# EAGLE board atmega328_dip (EAGLE 5.11)
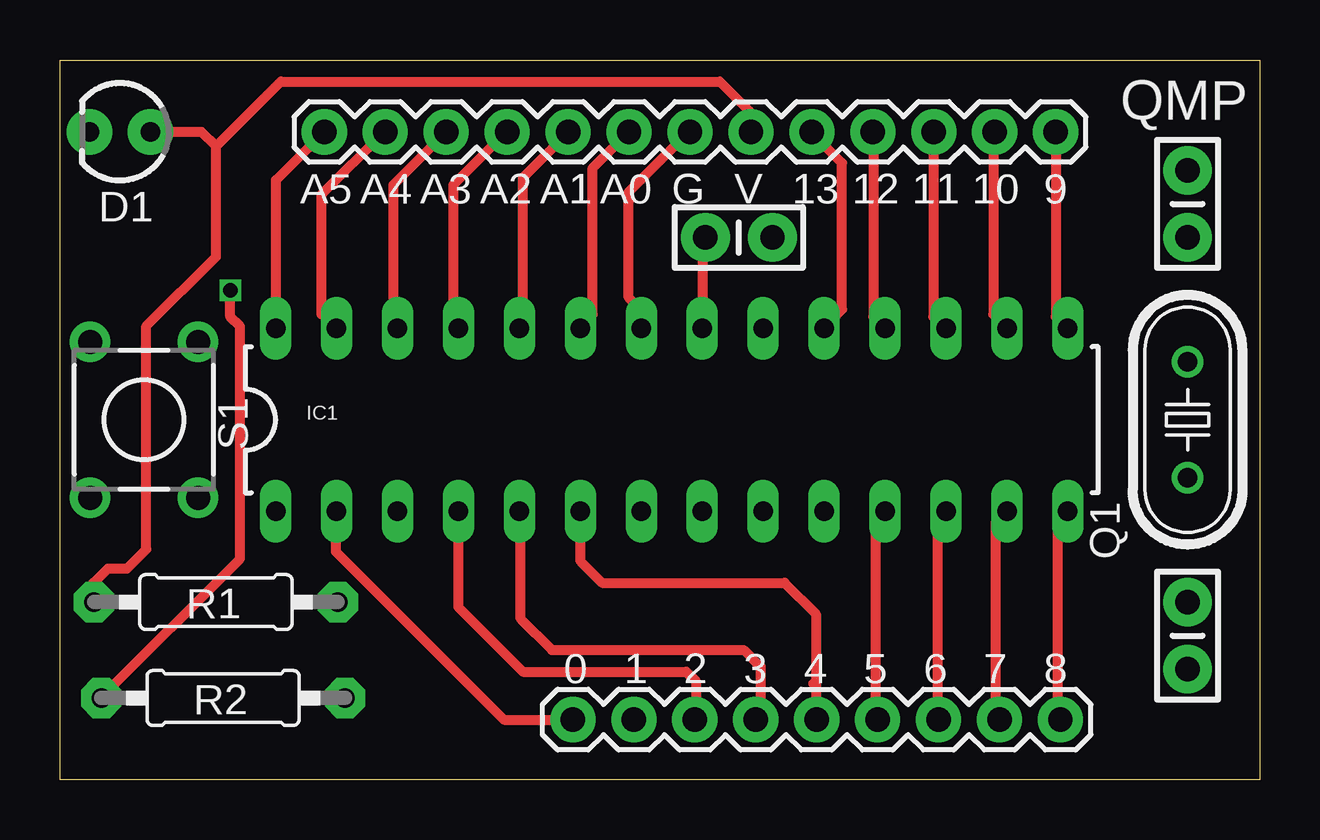
[diagram p0: board, top side]
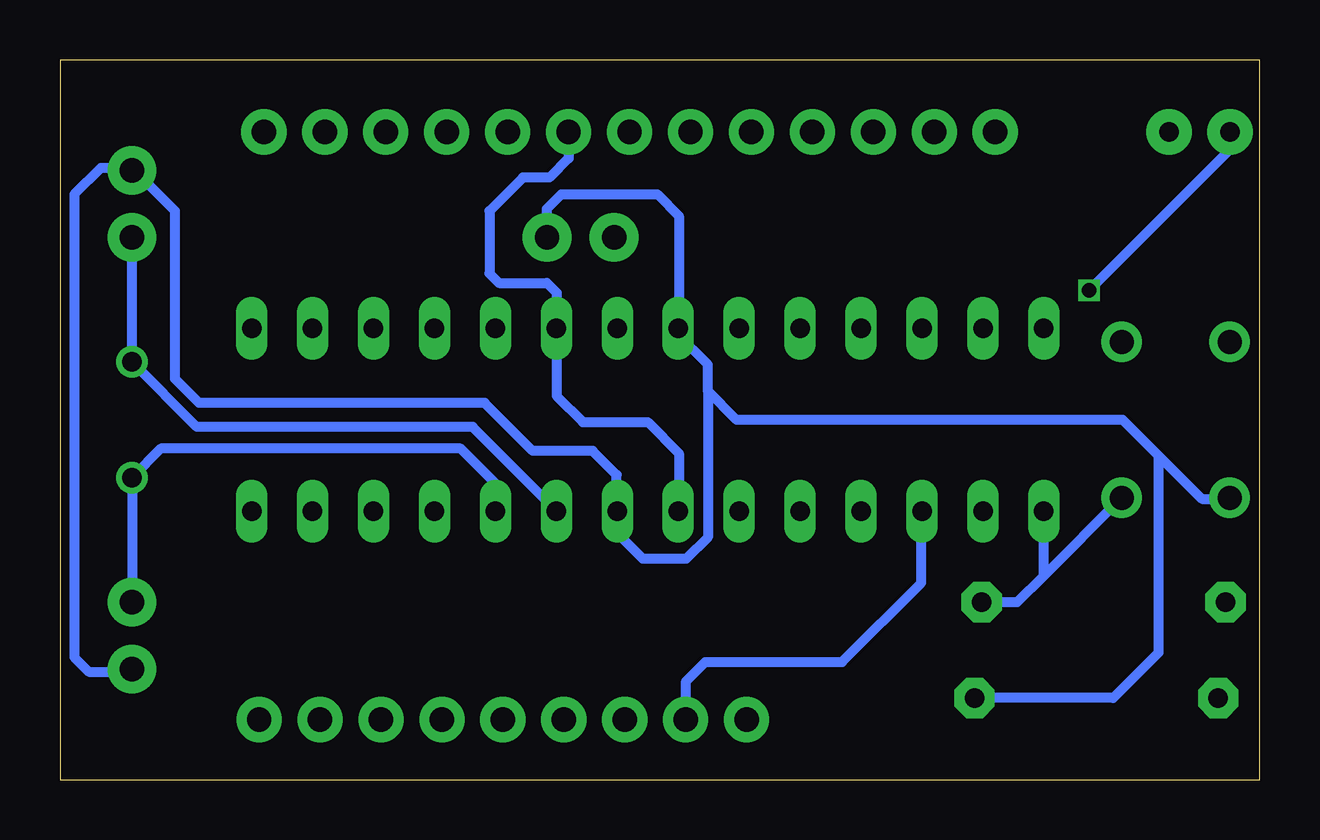
[diagram p1: board, bottom side, seen from below]

Size 50 x 30 mm. Coordinates in mm from the lower left corner, seen from the top.
Outline: 0,0 0,30 50,30 50,0 0,0
Copper layers (1*16): Top 0.035mm / dielectric 1.5mm / Bottom 0.035mm
Design rules "Fusion_eagle_rule_v1.1": minimum track width 6mil, minimum drill 12mil, track to track 6mil, track to pad 6mil, pad to pad 6mil, via to via 6mil, smd to smd 0mil, copper to edge 10mil, drill to drill 10mil, minimum pad ring 10mil, minimum via ring 6mil, stop-mask expansion 2mil, vias tented up to drill 100mil, thermal gap 10mil

## Footprints (pad centres in the part's own frame; a part is rotated, then mirrored left to right if it is on the bottom)
CAP-PTH-SMALL-KIT = drill 1.016 pad 2.032 round: 1 -1.397,0; 2 1.397,0
LED3MM = drill 0.813 pad 1.88 round: A -1.27,0; K 1.27,0
1X13 = drill 1.016 pad 1.88 round: 1 0,0; 2 2.54,0; 3 5.08,0; 4 7.62,0; 5 10.16,0; 6 12.7,0; 7 15.24,0; 8 17.78,0; 9 20.32,0; 10 22.86,0; 11 25.4,0; 12 27.94,0; 13 30.48,0
1X09 = drill 1.016 pad 1.88 round: 1 0,0; 2 2.54,0; 3 5.08,0; 4 7.62,0; 5 10.16,0; 6 12.7,0; 7 15.24,0; 8 17.78,0; 9 20.32,0
DIL28-3 = drill 0.813 long: 1 -16.51,-3.81; 2 -13.97,-3.81; 3 -11.43,-3.81; 4 -8.89,-3.81; 5 -6.35,-3.81; 6 -3.81,-3.81; 7 -1.27,-3.81; 8 1.27,-3.81; 9 3.81,-3.81; 10 6.35,-3.81; 11 8.89,-3.81; 12 11.43,-3.81; 13 13.97,-3.81; 14 16.51,-3.81; 15 16.51,3.81; 16 13.97,3.81; 17 11.43,3.81; 18 8.89,3.81; 19 6.35,3.81; 20 3.81,3.81; 21 1.27,3.81; 22 -1.27,3.81; 23 -3.81,3.81; 24 -6.35,3.81; 25 -8.89,3.81; 26 -11.43,3.81; 27 -13.97,3.81; 28 -16.51,3.81
HC49U-V = drill 0.813 round: 1 -2.413,0; 2 2.413,0
0207/10 = drill 0.813 pad 1.676 octagon: 1 -5.08,0; 2 5.08,0
TL1105 = drill 1 pad 1.676 round: 1 -2.25,3.25; 2 2.25,3.25; 3 -2.25,-3.25; 4 2.25,-3.25

## Placement (x,y rotation side)
C1  C1  [CAP-PTH-SMALL-KIT]  47,24 90 top
D1  [LED3MM]  2.5,27 180 top
E$1  [CAP-PTH-SMALL-KIT]  28.3,22.6 180 top
E$13  [CAP-PTH-SMALL-KIT]  47,6 90 top
E$14  [1X13]  41.5,27 180 top
E$15  [1X09]  41.7,2.5 180 top
IC1  [DIL28-3]  25.5,15 0 top
Q1  [HC49U-V]  47,15 270 top
R1  [0207/10]  6.5,7.4 180 top
R2  [0207/10]  6.8,3.4 180 top
S1  [TL1105]  3.5,15 180 top

## Library data of the parts
C1 D1 E$1 E$13-E$15 IC1 Q1 = SparkFun
R1 R2 = adafruit
S1 = switch

## Nets
S$6: E$14.1
S$12: E$14.6
S$60: E$14.11
S$71: E$15.6

## Tracks (layer width: path | path; a pad name or v marks a point on that pad's centre or on a via)
S$1
  Bottom 0.406: 23.9,2.6 23.9,4.1 23.1,4.9 17.4,4.9 14.1,8.2 14.1,11.1
S$2
  Top 0.406: 31.3,27 32.6,25.7 32.6,19.6 31.8,18.8
S$3
  Top 0.406: 33.9,27 33.9,19.3 34.4,18.8
S$4
  Top 0.406: 36.4,27 36.4,19.3 36.9,18.8
S$5
  Top 0.406: 38.9,27 38.9,19.4 39.5,18.8
S$6
  Top 0.406: E$14.1 41.5,19.3 42,18.8
S$7
  Top 0.406: 9,18.8 9,25 11,27
S$8
  Top 0.406: 26.8,18.8 26.8,22.5 26.9,22.6
S$9
  Bottom 0.406: 29.7,22.6 29.7,23.8 29.1,24.4 25.1,24.4 24.2,23.5 24.2,18.8 24.3,18.7
S$10
  Bottom 0.406: 46.9,25.5 48.3,25.5 49.4,24.4 49.4,5.1 48.8,4.5 47.1,4.5 47,4.6
S$11
  Top 0.406: 24.2,18.8 24.2,19.6 23.7,20.1 23.7,24.1 23.7,24.5 26.2,27
S$12
  Top 0.406: E$14.6 28.8,27.8 27.5,29.1 9.2,29.1 6.5,26.4 | 6.5,26.4 6.5,21.8 3.6,18.9 3.6,9.6 2.8,8.8 2,8.8 1.4,8.2 1.4,7.4 | 3.7,27 5.9,27 6.5,26.4
  Bottom 0.406: 24.2,11.1 24.2,13.6 25.5,14.9 28.2,14.9 29.3,16 29.3,20.3 29.7,20.7 31.7,20.7 32.1,21.1 32.1,23.7 30.7,25.1 29.6,25.1 28.8,25.9 E$14.6
S$13
  Bottom 0.406: 24.3,18.6 23,17.3 23,16.2 | 23,16.2 23,10.1 23.9,9.2 25.7,9.2 26.8,10.3 26.8,12.7 27.8,13.7 30.3,13.7 32.3,15.7 44.2,15.7 45.2,16.7 45.2,23.7 47,25.5 | 23,16.2 21.8,15 5.7,15 4.2,13.5 | 1.3,11.7 2.4,11.7 4.2,13.5 | 4.2,13.5 4.2,5.3 6.1,3.4 11.9,3.4
S$15  (via drill 0.6)
  Top 0.406: v7.1,20.4 7.1,19.3 7.5,18.9 7.5,9.2 1.7,3.4
  Bottom 0.406: 1.2,27 1.2,26.3 v7.1,20.4
S$31
  Bottom 0.406: 31.9,11.2 31.9,12.4 33.3,13.8 45.8,13.8 47,12.6 47,7.4
S$32
  Bottom 0.406: 29.3,11.2 32.8,14.7 44.3,14.7 47,17.4 47,22.5
S$34
  Bottom 0.406: 5.8,11.8 5.8,11.7 9,8.5 | 9,8.5 9,11.2 | 9,8.5 10.1,7.4 11.5,7.4
S$49
  Top 0.406: 41.7,2.6 41.6,2.7 41.6,10.7 42,11.1
S$50
  Top 0.406: 39.1,2.6 39,2.7 39,10.7 39.4,11.1
S$51
  Top 0.406: 36.6,2.4 36.6,10.9 36.9,11.2
S$52
  Top 0.406: 34.3,11.1 34,10.8 34,2.6 34.1,2.5
S$59
  Top 0.406: 11.5,18.8 10.9,19.4 10.9,24.4 13.5,27
S$60
  Top 0.406: 14.1,18.8 13.9,19 13.9,24.8 E$14.11
S$61
  Top 0.406: 16.6,18.8 16.4,19 16.4,24.8 18.6,27
S$62
  Top 0.406: 19.2,18.8 19.3,18.9 19.3,25.1 21.2,27
S$63
  Top 0.406: 21.7,18.9 22.2,19.4 22.2,25.5 23.7,27
S$70
  Top 0.406: 31.5,4.1 31.5,6.9 30.2,8.2 22.6,8.2 21.7,9.1 21.7,11.2 | 31.5,4.1 31.4,4 | 31.5,4.1 31.5,2.6 31.6,2.5
S$71
  Top 0.406: 19.2,11.2 19.2,6.7 20.5,5.4 28.5,5.4 29.2,4.7 29.2,2.7 E$15.6
S$72
  Top 0.406: 16.6,11.2 16.6,7.2 19.3,4.5 26.1,4.5 26.5,4.1 26.5,2.6 26.4,2.5
S$73
  Top 0.406: 11.5,11.2 11.5,9.5 18.5,2.5 21.4,2.5

## Text on the board
tNames: QMP | A5 | A4 | A3 | A2 | A1 | A0 | G | V | 13 | 12 | 11 | 10 | 9 | 0 | 1 | 2 | 3 | 4 | 5 | 6 | 7 | 8